# Altium PCB Valdis.PcbDoc
Units mm, origin at the board's own origin, x right, y up, seen from the top; angles counter-clockwise.
Board outline 30 x 42 mm, 4 copper layers (Top Layer, Top Inner Layer, Bottom Inner Layer, Bottom Layer), stack 0.568 mm thick; 54 components, 50 nets, 208 pads, 25 vias.
Unrouted connection lines stored in the file: 43.
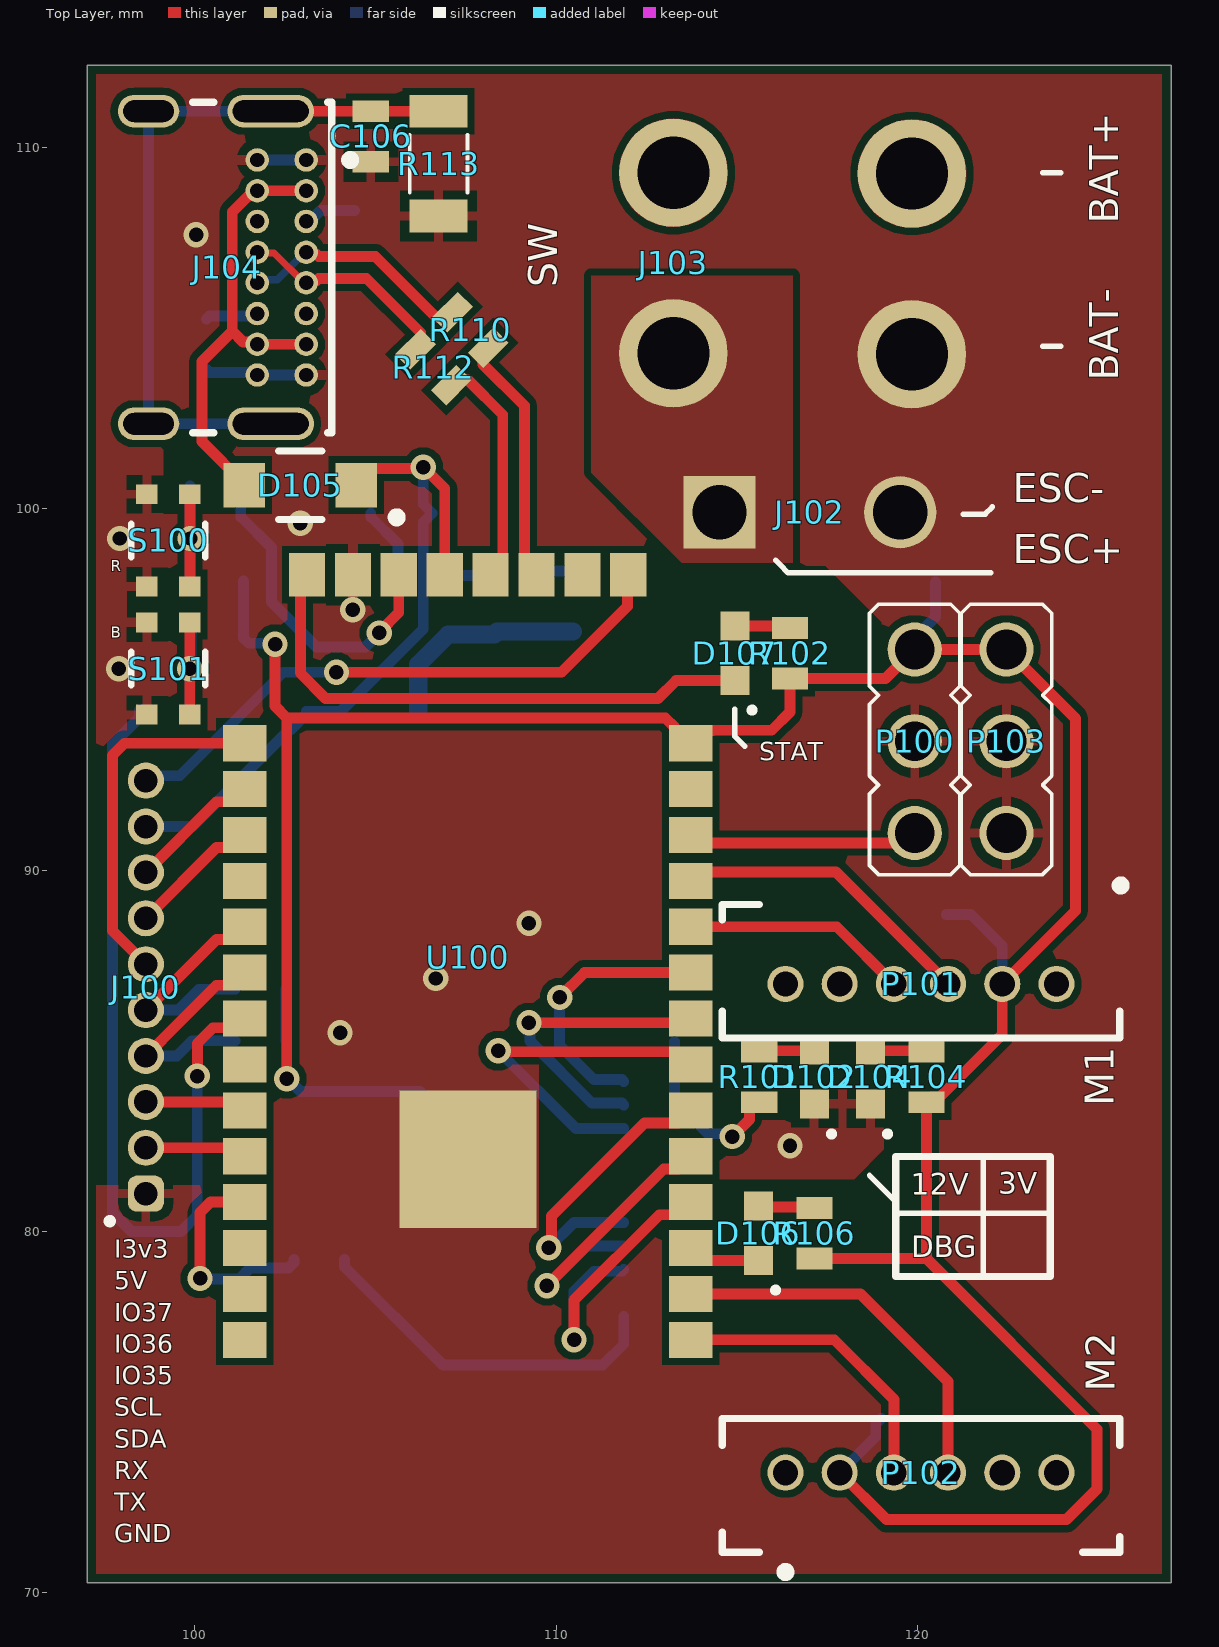
[diagram p0: Top Layer view]
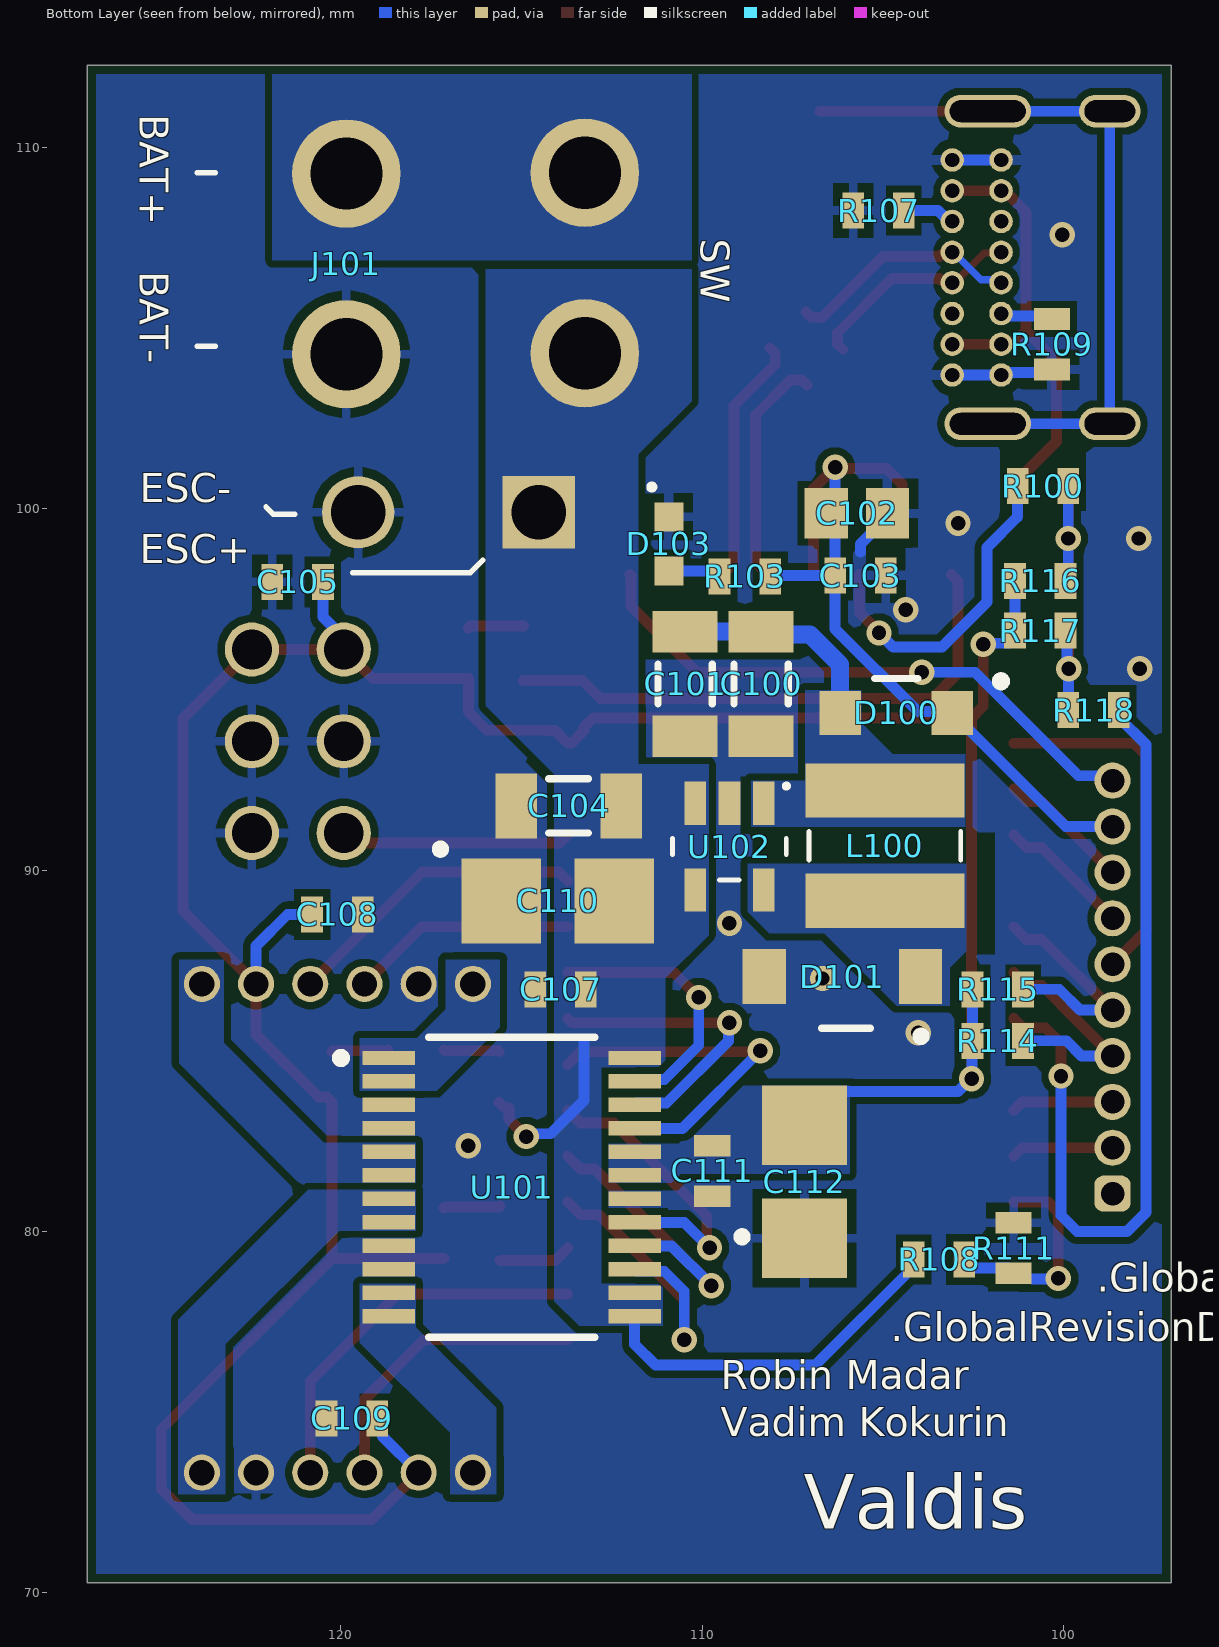
[diagram p1: Bottom Layer view, seen from below]
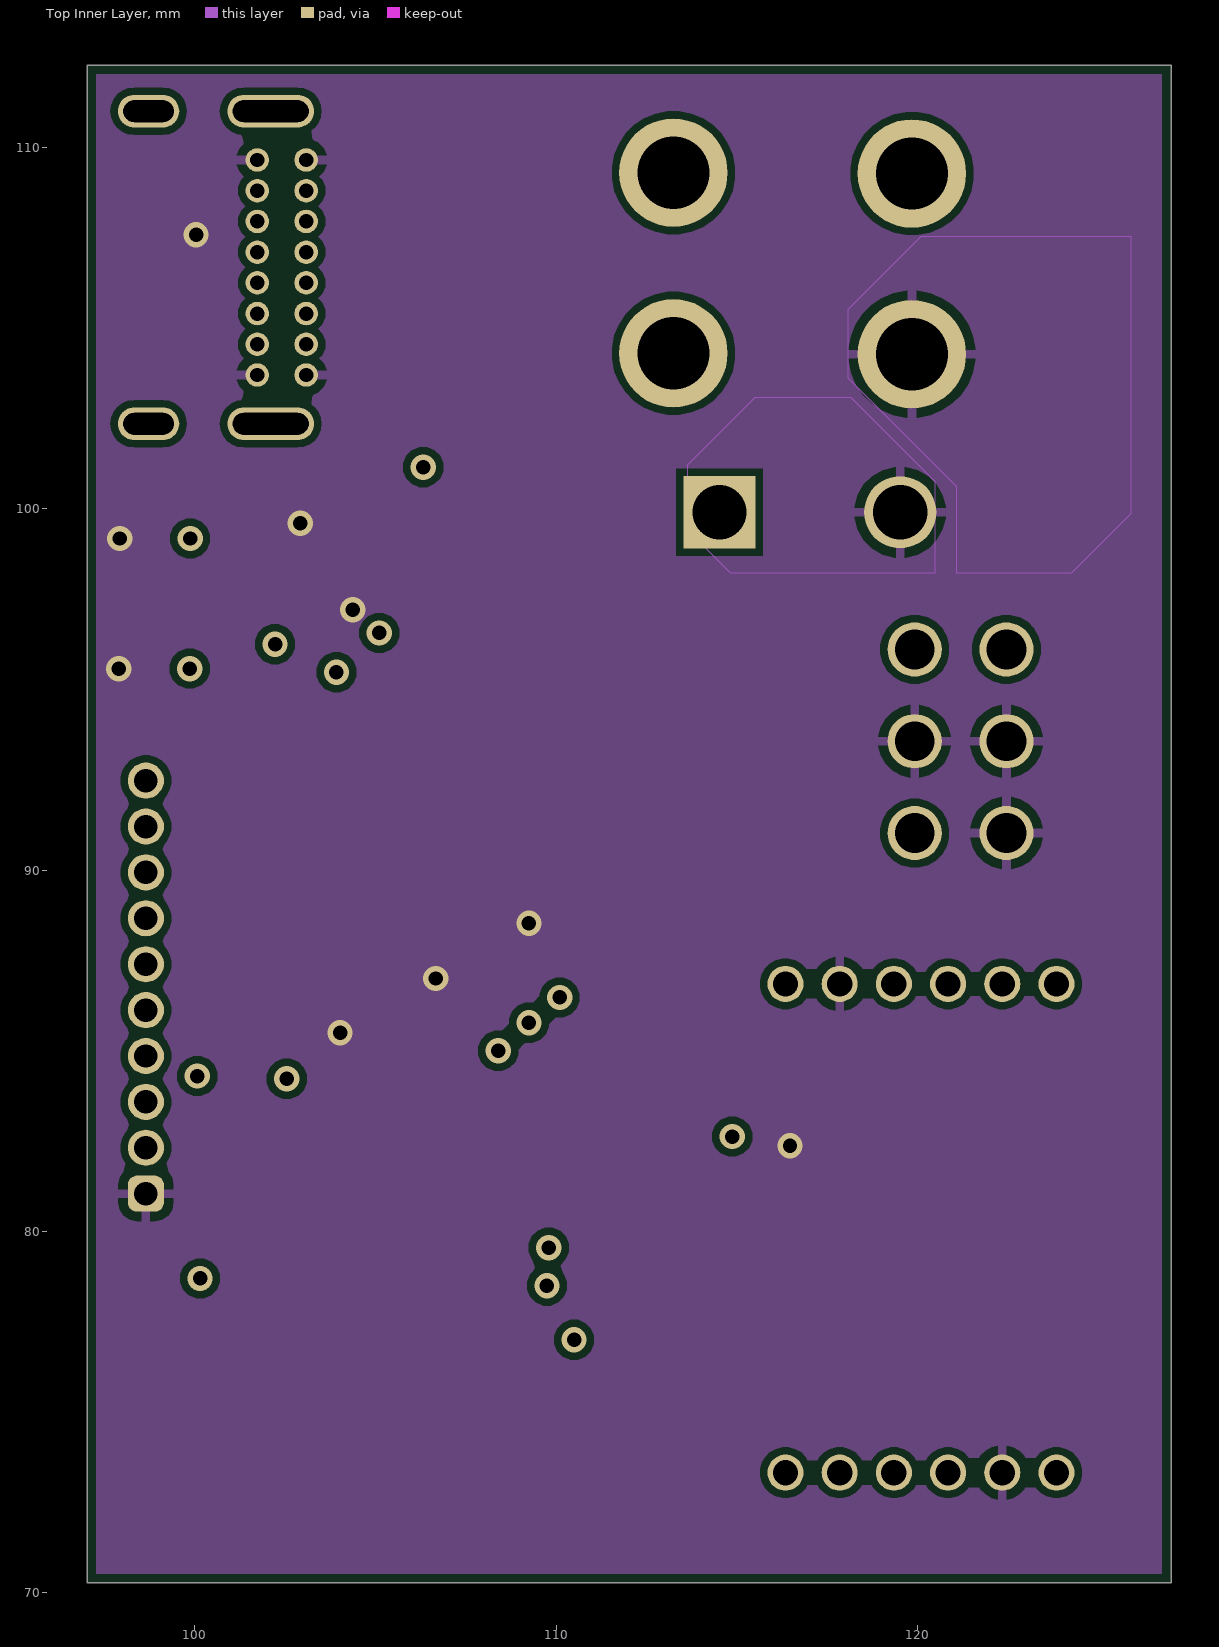
[diagram p2: Top Inner Layer]
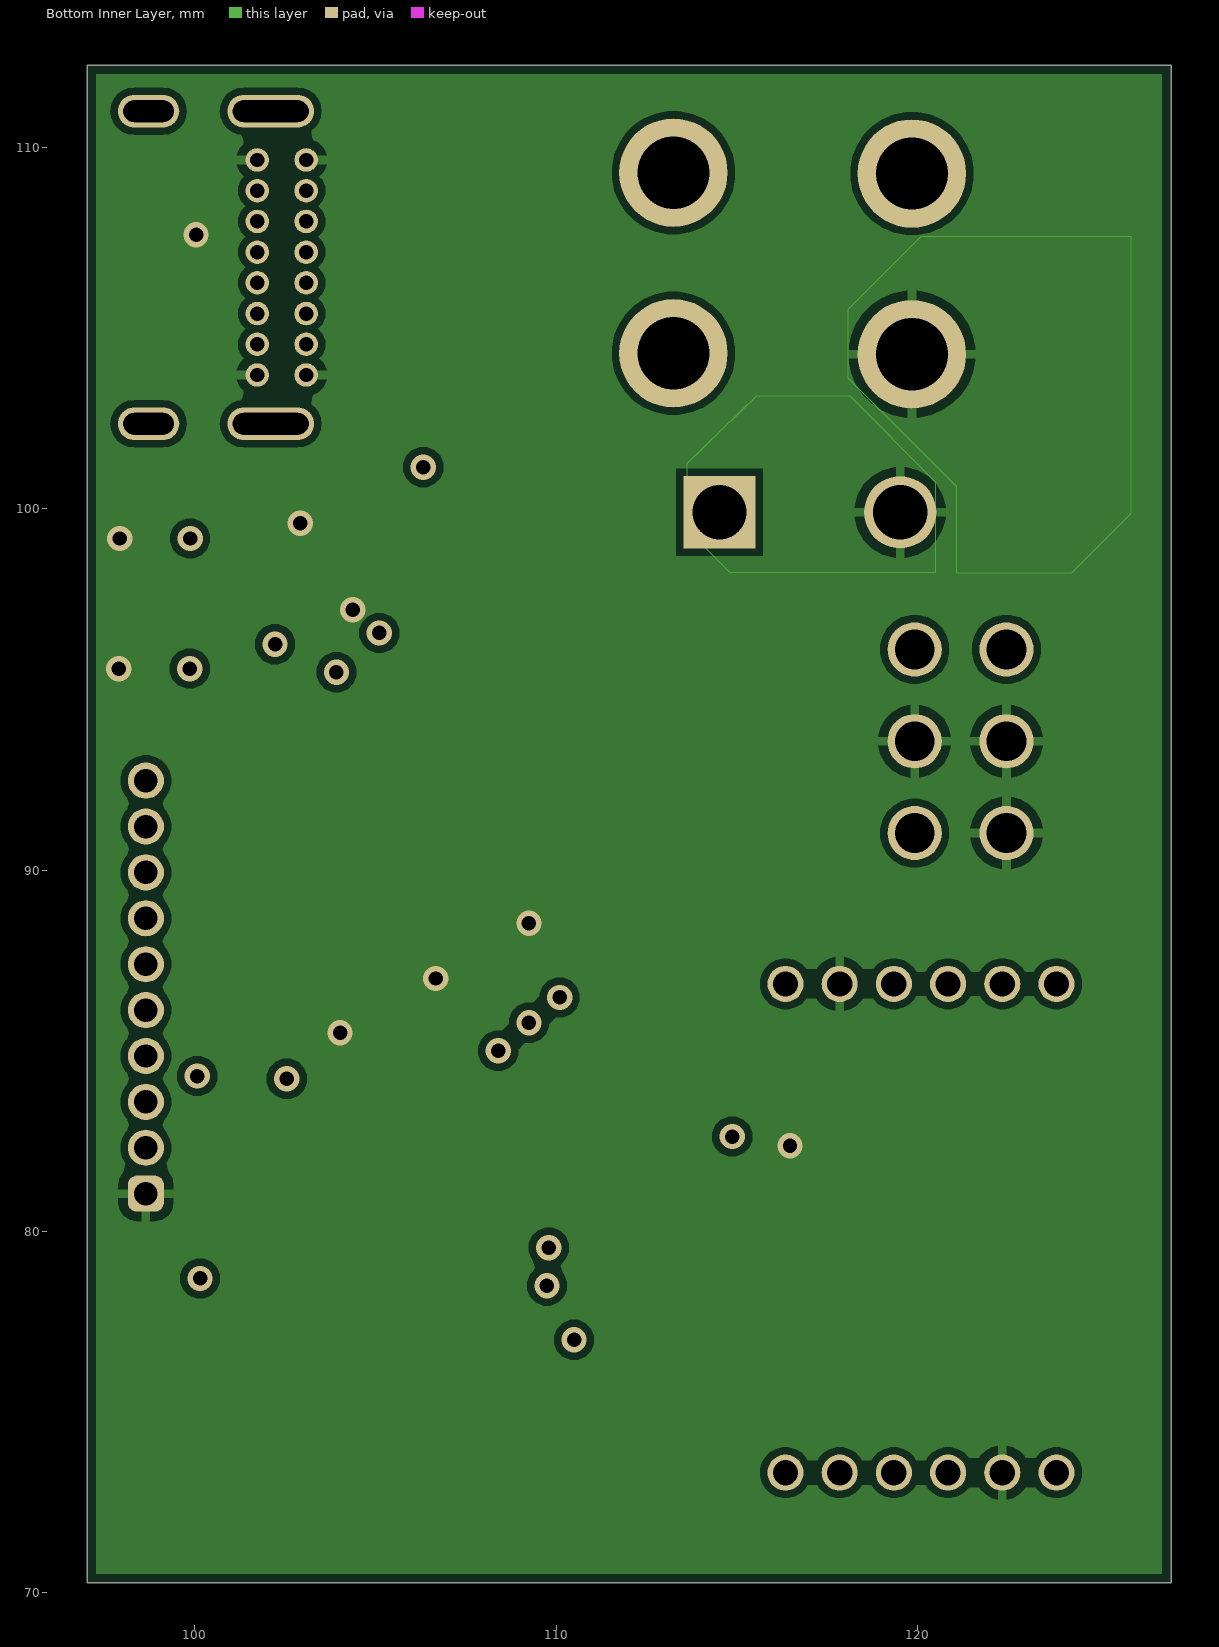
[diagram p3: Bottom Inner Layer]
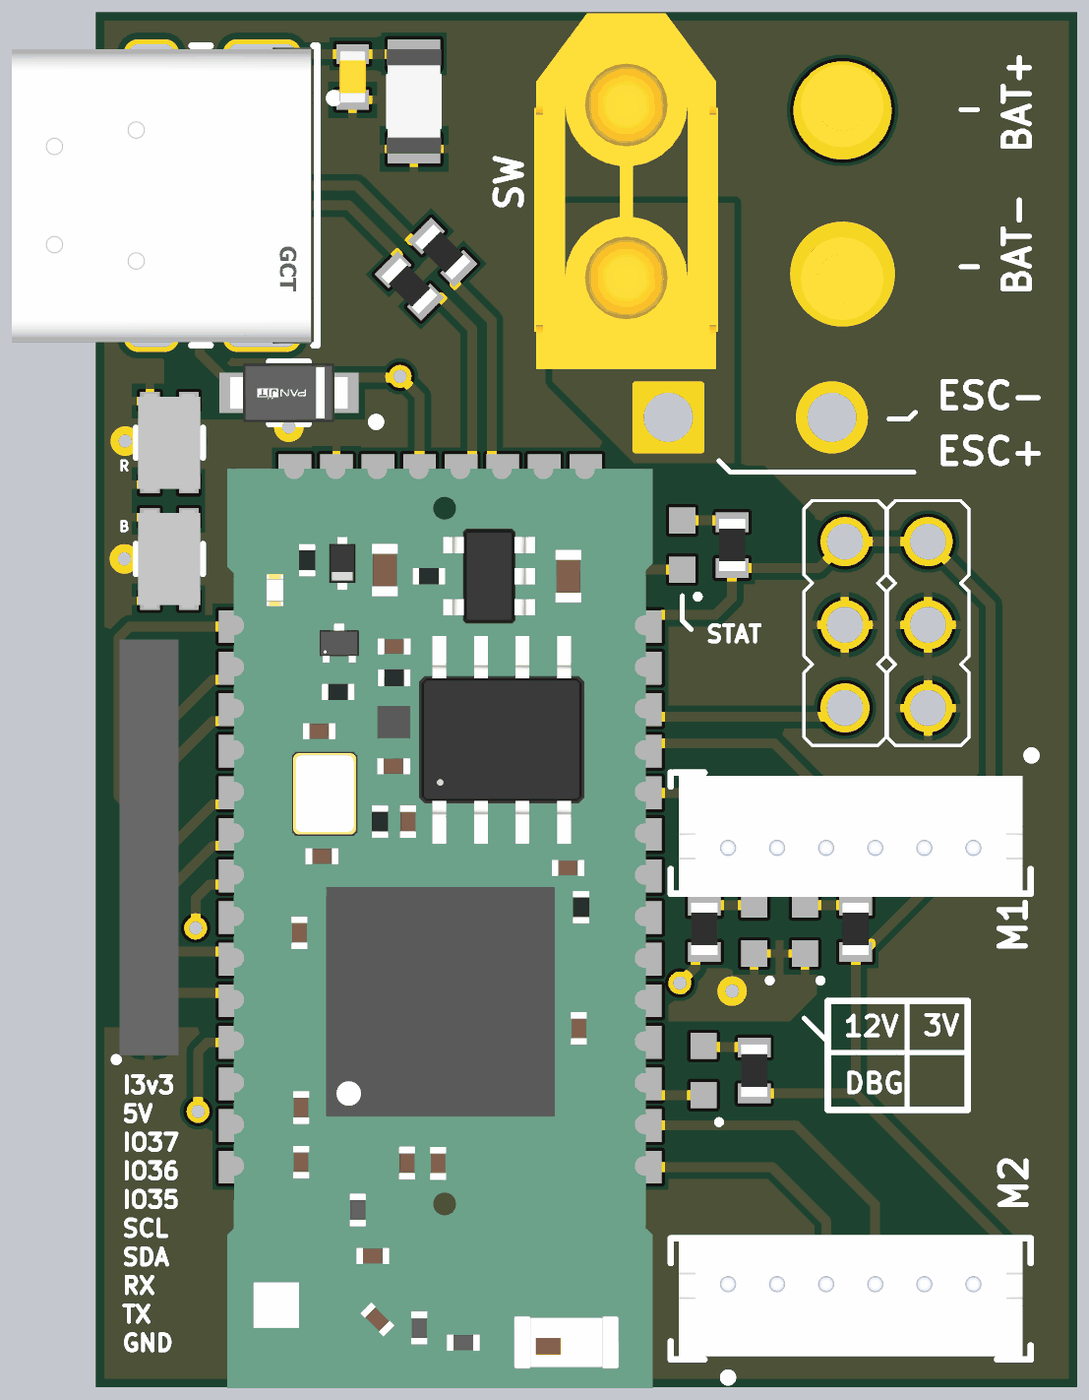
[diagram p4: 3D render of the assembled board from above, using the file's embedded part models]
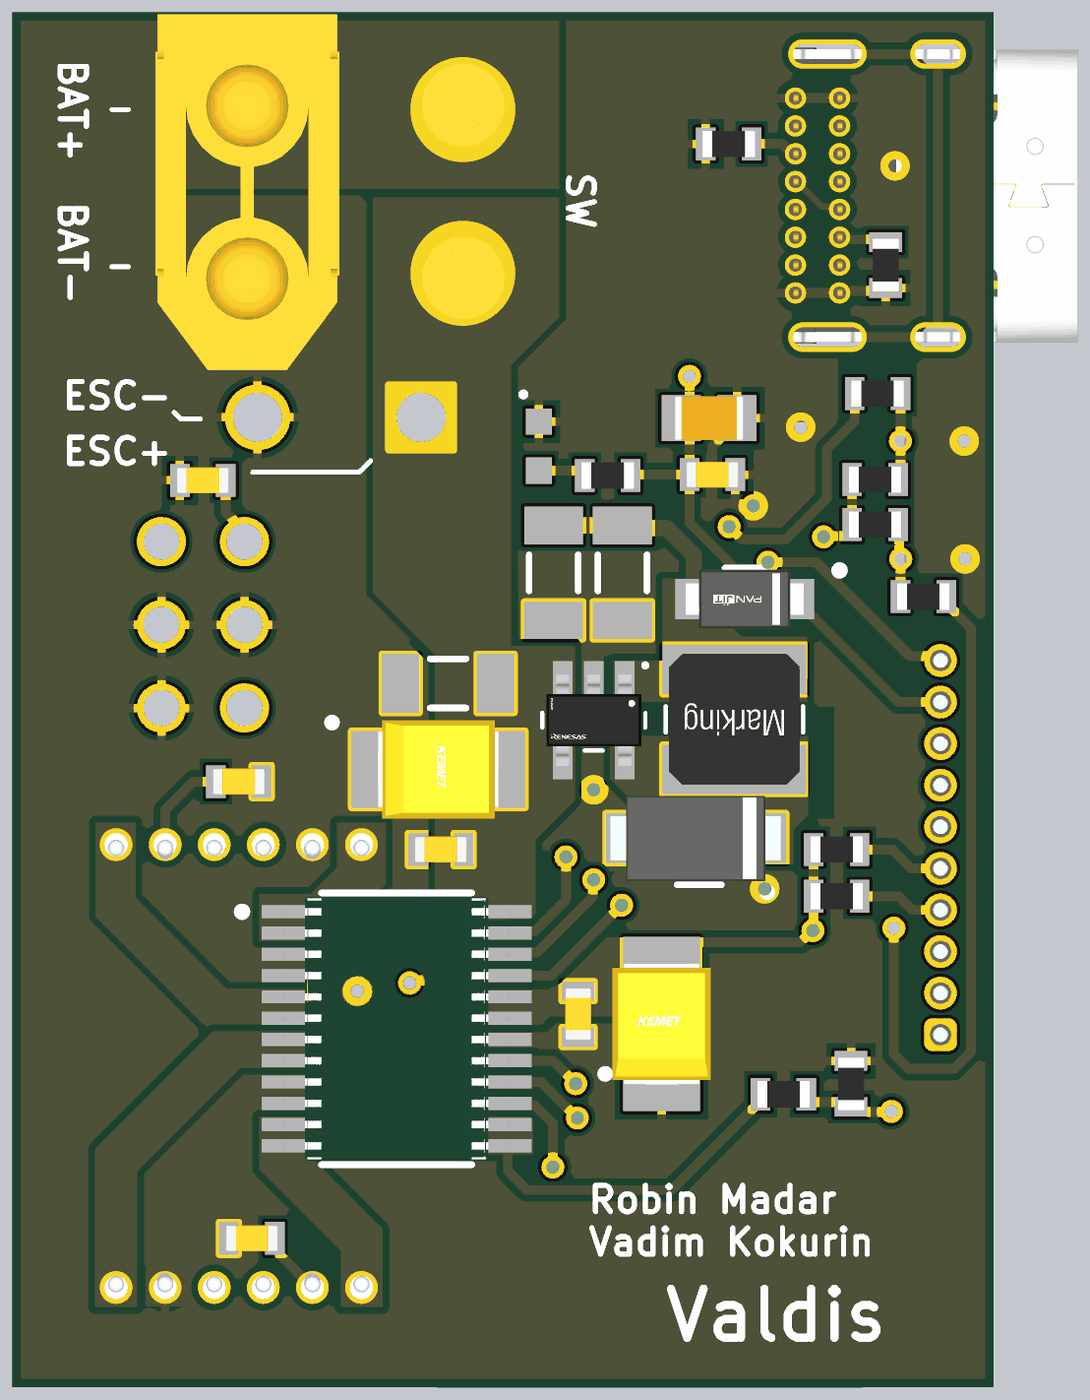
[diagram p5: 3D render of the assembled board from below, using the file's embedded part models]

## Layer stack, top to bottom
Top Solder: solder mask 0.0102, Solder Resist, Dk 3.5
Top Layer: signal copper 0.0356
Dielectric 2: prepreg 0.0711, PP-006, Dk 4.1
Top Inner Layer: signal copper 0.0175
Dielectric 1: dielectric 0.32, FR-4, Dk 4.8
Bottom Inner Layer: signal copper 0.0175
Dielectric 3: prepreg 0.0711, PP-006, Dk 4.1
Bottom Layer: signal copper 0.0356
Bottom Solder: solder mask 0.0102, Solder Resist, Dk 3.5

## Board outline
97.025,70.275 97.025,112.275 127.025,112.275 127.025,70.275

## Design rules (kind name [scope] priority, off if disabled: settings)
BoardOutlineClearance [All] p1: gap=0.254 ignorepadtopadclearanceinfootprint=FALSE except(0: Arc-SplitContinuation Track-SplitContinuation SMDPad-SplitContinuation THPad-SplitContinuation Via-SplitContinuation Fill-SplitContinuation Poly-SplitContinuation Region-SplitContinuation Text-SplitContinuation)
Clearance [All] p1: gap=0.2 ignorepadtopadclearanceinfootprint=FALSE
ComponentClearance [All] p1: gap=0.254 collisioncheckmode=3 verticalgap=0.254 showdistances=FALSE donotcheckwithout3dbody=TRUE
DiffPairsRouting USB90 [All] p1: maxlimit=0.3 minlimit=0.127 mostfreqgap=0.127 toplayer_minwidth=0.12 toplayer_maxwidth=0.3 toplayer_prefwidth=0.12 midlayer1_maxgap=0.2 midlayer1_minwidth=0.111 midlayer1_maxwidth=0.2 midlayer1_prefwidth=0.176 midlayer2_maxgap=0.2 midlayer2_minwidth=0.111 midlayer2_maxwidth=0.2 midlayer2_prefwidth=0.176 bottomlayer_minwidth=0.12 bottomlayer_maxwidth=0.3 bottomlayer_prefwidth=0.12 impedanceprofiledriven=TRUE impedanceprofileid={D86571FE-92CB-432F-B134-A54A2EC93053} impedanceprofilevalue=90.000000 maxuncoupledlength=12.7
DiffPairsRouting DiffPairsRouting_1 [All] p2: maxlimit=0.254 minlimit=0.254 mostfreqgap=0.254 toplayer_minwidth=0.381 toplayer_maxwidth=0.381 toplayer_prefwidth=0.381 midlayer1_minwidth=0.381 midlayer1_maxwidth=0.381 midlayer1_prefwidth=0.381 midlayer2_minwidth=0.381 midlayer2_maxwidth=0.381 midlayer2_prefwidth=0.381 bottomlayer_minwidth=0.381 bottomlayer_maxwidth=0.381 bottomlayer_prefwidth=0.381 maxuncoupledlength=12.7
HoleSize [All] p1: absolutevalues=TRUE maxlimit=3 minlimit=0.025 maxpercent=80.000 minpercent=20.000
MinimumSolderMaskSliver [All] p1: minsoldermaskwidth=0
PlaneClearance [IsNamedPolygon('Main')] p1: clearance=1
PlaneClearance PlaneClearance_1 [All] p2: clearance=0.508
PolygonConnect MainPWR [All vs IsNamedPolygon('Main') OR IsNamedPolygon('Main')] p1: connectstyle=Direct reliefconductorwidth=0.254 reliefentries=4 polygonreliefangle="90 Angle" airgapwidth=0.254
PolygonConnect PolygonConnect_1 [All] p2: thpad.connectstyle=Relief thpad.reliefconductorwidth=0.254 thpad.reliefentries=4 thpad.polygonreliefangle="90 Angle" thpad.airgapwidth=0.254 smdpad.connectstyle=Relief smdpad.reliefconductorwidth=0.254 smdpad.reliefentries=4 smdpad.polygonreliefangle="90 Angle" smdpad.airgapwidth=0.254 via.connectstyle=Direct via.reliefconductorwidth=0.254 via.reliefentries=4 via.polygonreliefangle="90 Angle" via.airgapwidth=0.254
RoutingVias [All] p1: holewidth=0.4 width=0.7 viastyle="Through Hole" minholewidth=0.3 minwidth=0.5 maxholewidth=0.7 maxwidth=1
SilkToSolderMaskClearance [IsPad] p1: minsilkscreentomaskgap=0.1 clearancetoexposedcopper=TRUE
SolderMaskExpansion IsVia [IsVia] p1: expansion=0 istentingtop=FALSE soldermaskfromhole=TRUE
SolderMaskExpansion SolderMaskExpansion_1 [All] p2: expansion=0.102 istentingtop=FALSE
SupplyNets "Schematic Supply Nets_4" [InNet('I3V3')] p1: voltage=0.000
SupplyNets "Schematic Supply Nets_3" [InNet('+3V3')] p2: voltage=0.000
SupplyNets "Schematic Supply Nets_2" [InNet('+5V')] p3: voltage=0.000
SupplyNets "Schematic Supply Nets_1" [InNet('+12V')] p4: voltage=0.000
SupplyNets "Schematic Supply Nets" [InNet('GND')] p5: voltage=0.000
Width [All] p1: maxlimit=3 minlimit=0.2 preferedwidth=0.3 toplayer_maxwidth=2 midlayer1_minwidth=0.254 midlayer1_maxwidth=0.254 midlayer1_prefwidth=0.254 midlayer2_minwidth=0.254 midlayer2_maxwidth=0.254 midlayer2_prefwidth=0.254 minimp=50.000000 maximp=50.000000 favimp=50.000000
24 further rules are at their usual default settings.

## Classes and differential pairs
differential pair USB_D: +USB_D_P -USB_D_N
differential pair D: +D_P -D_N

## Components (designator, comment, footprint, x,y, rotation, side; value= is the part's Value field where it differs from the comment)
C100 "22u" MLCC_1206_M 108.375,95.15 r90 bottom value=22µF
C101 "22u" MLCC_1206_M 110.475,95.15 r90 bottom value=22µF
C102 "4.7u" MLCC_0805_M 105.725,99.875 r0 bottom value=4,7µF
C103 "100n" MLCC_0603_M 105.625,98.15 r0 bottom value=100nF
C104 "4.7u" MLCC_1206_M 113.7,91.775 r180 bottom value=4,7µF
C105 "100n" MLCC_0603_M 121.2,97.975 r0 bottom value=100nF
C106 "1n" MLCC_0603_M 104.875,110.3 r270 top value=1nF
C107 "100n" MLCC_0603_M 113.925,86.7 r0 bottom value=100nF
C108 "100n" MLCC_0603_M 120.1,88.775 r0 bottom value=100nF
C109 "100n" MLCC_0603_M 119.7,74.825 r180 bottom value=100nF
C110 "T495B106K025ATE750" 593D106X9025C2TE3-Footprint-1 114,89.15 r180 bottom value=10µF
C111 "100n" MLCC_0603_M 109.725,81.675 r270 bottom value=100nF
C112 "T495B106K025ATE750" 593D106X9025C2TE3-Footprint-1 107.175,81.375 r90 bottom value=10µF
D100 "MBR1020VL_R1_00001" FP-MBR1020VL_R1_00001-MFG 104.638,94.35 r0 bottom
D101 "VSSAF3M10HM3/H" VSSAF3M10HM3_H-Footprint-1 106.125,87.05 r0 bottom
D102 "Red" "0603 RED LED" 117.15,84.275 r270 top
D103 "Red" "0603 RED LED" 110.925,99.025 r90 bottom
D104 "Red" "0603 RED LED" 118.7,84.275 r270 top
D105 "MBR1020VL_R1_00001" FP-MBR1020VL_R1_00001-MFG 102.925,100.65 r180 top
D106 "Red" "0603 RED LED" 115.6,79.95 r270 top
D107 "Red" "0603 RED LED" 114.95,96 r270 top
J100 "HPH1-A-10-UA" HPH1-A-10-UA 98.65,86.76 r90 top
J101 "XT30U-F" XT30U-F 119.85,106.775 r180 bottom
J102 "CUSTOM ESC" "CUSTOM ESC-Footprint-1" 117.025,99.9 r90 top
J103 "XT30U-F" XT30U-F 113.25,106.8 r180 top
J104 "USB4085-GF-A" FP-USB4085-GF-A-MFG 99.06,106.675 r270 top
L100 "74404043220A" WE-LQS_4025 104.95,90.675 r90 bottom value=22µH
P100 "M20-9990345" "3Pos Pin Header" 119.925,93.545 r270 top
P101 "B6B-ZR(LF)(SN)" FP-B6B-ZR-SM4-TF_LF_SN-MFG 120.1,86.85 r180 top
P102 "B6B-ZR(LF)(SN)" FP-B6B-ZR-SM4-TF_LF_SN-MFG 120.1,73.325 r0 top
P103 "M20-9990345" "3Pos Pin Header" 122.465,93.545 r270 top
R100 "100R" Resistor_0603_M 100.575,100.625 r0 bottom value=100
R101 "680R" Resistor_0603_M 115.625,84.275 r270 top value=680
R102 "200R" Resistor_0603_M 116.475,96 r90 top value=200
R103 "200R" Resistor_0603_M 108.825,98.125 r0 bottom value=200
R104 "100R" Resistor_0603_M 120.25,84.275 r90 top value=100
R106 "200R" Resistor_0603_M 117.15,79.95 r90 top value=200
R107 "5.1k" Resistor_0603_M 105.125,108.25 r0 bottom value=5,1k
R108 "1k" Resistor_0603_M 103.45,79.225 r0 bottom
R109 "5.1k" Resistor_0603_M 100.325,104.55 r90 bottom value=5,1k
R110 "22R" Resistor_0603_M 107.629,104.946 r315 top value=22
R111 "200R" Resistor_0603_M 101.385,79.541 r270 bottom value=220
R112 "22R" Resistor_0603_M 106.609,103.916 r315 top value=22
R113 "1M" Resistor_1206_M 106.75,109.55 r270 top
R114 "4.7k" Resistor_0603_M 101.825,85.275 r0 bottom value=4,7k
R115 "4.7k" Resistor_0603_M 101.825,86.7 r0 bottom value=4,7k
R116 "10k" Resistor_0603_M 100.65,98 r0 bottom
R117 "10k" Resistor_0603_M 100.65,96.625 r0 bottom
R118 "100R" Resistor_0603_M 99.175,94.425 r180 bottom value=100
S100 "USLPT2819DT4TR" USLPT2819DT4TR-Footprint-1 99.275,99.125 r90 top
S101 "USLPT2819DT4TR" USLPT2819DT4TR-Footprint-1 99.275,95.575 r90 top
U100 "NanoS3" NanoS3 108.19,94.365 r270 top
U101 "TB6612FNG,C,8,EL" FP-SSOP24-P-300-0_65A-MFG 115.275,81.225 r180 bottom
U102 "RAA2118054GP3#JA0" P5_064B_MFG 109.25,90.65 r270 bottom

## Footprints (in the part's own frame and the unit in brackets; to place one, negate y for a bottom-side part, rotate by r counter-clockwise, add the part's x,y. Pads: shape width x height; smd on the part's side, far side on the other; paste and mask are expansions set on the pad)
"3Pos Pin Header" [mm]
  round 1.5 hole 1.1: 1(-2.56,0) 2(-0.02,0) 3(2.52,0)
  silkscreen extent -3.81,-1.25 3.67,1.25
593D106X9025C2TE3-Footprint-1 [mm]
  rect 2.2x2.35 smd: 1(-1.56,0) 2(1.56,0)
  silkscreen extent -3.36,1.32 -3.14,1.54, body extent -1.85,-1.5 1.85,1.5, height 2.1
"0603 RED LED" [mm] "Generic 0603 RED LED"
  rect 0.8x0.8 smd: 1(0.75,0) 2(-0.75,0)
  silkscreen extent 1.55,0.45 1.6,0.5, body extent -0.8,-0.4 0.8,0.4, height 0.4
"CUSTOM ESC-Footprint-1" [mm]
  rect 2x2 hole 1.5: 1(0,2.5)
  round 2 hole 1.5: 2(0,-2.5)
FP-B6B-ZR-SM4-TF_LF_SN-MFG [mm]
  round 1 hole 0.7 paste-2539.97 mask+0: 1(-3.75,0) 2(-2.25,0) 3(-0.75,0) 4(0.75,0) 5(2.25,0) 6(3.75,0)
  silkscreen extent -5.65,-2.85 5.5,1.5, body extent -5.25,-2.1 5.25,1.4, height 4.5
FP-MBR1020VL_R1_00001-MFG [mm]
  rect 1.15x1.22 smd paste+0 mask+0: 1(-1.55,0) 2(1.55,0)
  silkscreen extent -3.02,-1 0.6,-0.75, body extent -1.8,-0.9 1.8,0.9, height 1.1
FP-SSOP24-P-300-0_65A-MFG [mm]
  rect 1.45x0.4 smd paste+0 mask+0: 1(-3.4,3.575) 2(-3.4,2.925) 3(-3.4,2.275) 4(-3.4,1.625) 5(-3.4,0.975) 6(-3.4,0.325) 7(-3.4,-0.325) 8(-3.4,-0.975) 9(-3.4,-1.625) 10(-3.4,-2.275) 11(-3.4,-2.925) 12(-3.4,-3.575) 13(3.4,-3.575) 14(3.4,-2.925) 15(3.4,-2.275) 16(3.4,-1.625) 17(3.4,-0.975) 18(3.4,-0.325) 19(3.4,0.325) 20(3.4,0.975) 21(3.4,1.625) 22(3.4,2.275) 23(3.4,2.925) 24(3.4,3.575)
  silkscreen extent -4.85,-4.15 2.3,4.15, body extent -3.8,-4.03 3.8,4.03, height 1.6
FP-USB4085-GF-A-MFG [mm]
  rrect100% 0.9x2.4 hole 2.1 slot 0.6 at 0 deg paste-2539.97 mask+0: 1(-4.325,3.045) 2(4.325,3.045)
  rrect100% 0.9x1.7 hole 1.4 slot 0.6 at 0 deg paste-2539.97 mask+0: 3(-4.325,-0.335) 4(4.325,-0.335)
  round 0.65 hole 0.4 paste-2539.97 mask+0: A1(-2.975,4.025) A4(-2.125,4.025) A5(-1.275,4.025) A6(-0.425,4.025) A7(0.425,4.025) A8(1.275,4.025) A9(2.125,4.025) A12(2.975,4.025) B1(2.975,2.675) B4(2.125,2.675) B5(1.275,2.675) B6(0.425,2.675) B7(-0.425,2.675) B8(-1.275,2.675) B9(-2.125,2.675) B12(-2.975,2.675)
  silkscreen extent -4.57,0.89 4.57,5.37, body extent -4.51,-4.6 4.51,4.57, height 3.46
HPH1-A-10-UA [mm] "1.27 MM SOCKET HEADER; 10 POS"
  rrect50% 1x1 hole 0.65: 1(-5.715,0)
  round 1 hole 0.65: 2(-4.445,0) 3(-3.175,0) 4(-1.905,0) 5(-0.635,0) 6(0.635,0) 7(1.905,0) 8(3.175,0) 9(4.445,0) 10(5.715,0)
  silkscreen extent -6.55,0.93 -6.4,1.07, body extent -6.35,-0.9 6.35,0.9, height 4.47
MLCC_0603_M [mm]
  rect 0.6x1 smd: 1(-0.7,0) 2(0.7,0)
  body extent -0.8,-0.4 0.8,0.4, height 0.92
MLCC_0805_M [mm] "Chip Capacitor, 2-Leads, Body 2,00x1,25mm, IPC Medium Density"
  rect 1.2x1.4 smd: 1(-0.85,0) 2(0.85,0)
  body extent -1.05,-0.67 1.05,0.67, height 1.35
MLCC_1206_M [mm]
  rect 1.15x1.8 smd: 1(-1.45,0) 2(1.45,0)
  silkscreen extent -0.55,-0.75 0.55,0.75, body extent -1.7,-0.9 1.7,0.9, height 0.75
NanoS3 [mm]
  rect 1.2x1 smd: 1(-3.81,-5.08) 2(-3.81,-3.81) 3(-3.81,-2.54) 4(-3.81,-1.27) 5(-3.81,0) 6(-3.81,1.27) 7(-3.81,2.54) 8(-3.81,3.81)
  rect 1x1.2 smd: 9(0.854,5.535) 10(2.124,5.535) 11(3.394,5.535) 12(4.664,5.535) 13(5.934,5.535) 14(7.204,5.535) 15(8.474,5.535) 16(9.744,5.535) 17(11.014,5.535) 18(12.284,5.535) 19(13.554,5.535) 20(14.824,5.535) 21(16.094,5.535) 22(17.364,5.535) 23(0.854,-6.805) 24(2.124,-6.805) 25(3.394,-6.805) 26(4.664,-6.805) 27(5.934,-6.805) 28(7.204,-6.805) 29(8.474,-6.805) 30(9.744,-6.805) 31(11.014,-6.805) 32(12.284,-6.805) 33(13.554,-6.805) 34(14.824,-6.805) 35(16.094,-6.805) 36(17.364,-6.805)
  rect 3.8x3.8 smd: 37(12.364,-0.625)
  body extent -3.97,-7.15 24.12,5.85, height 2.38
P5_064B_MFG [mm] "Recommended Land Pattern"
  rect 1.2x0.6 smd paste+0 mask+0: 1(-1.2,0.95) 2(-1.2,0) 3(-1.2,-0.95) 4(1.2,-0.95) 5(1.2,0.95)
  silkscreen extent -1.74,-1.58 0.92,1.64, body extent -1.4,-1.45 1.4,1.45, height 1.1
Resistor_0603_M [mm]
  rect 0.6x1 smd: 1(-0.7,0) 2(0.7,0)
  body extent -0.8,-0.4 0.8,0.4, height 0.45
Resistor_1206_M [mm]
  rect 0.9x1.6 smd: 1(-1.45,0) 2(1.45,0)
  silkscreen extent -0.8,-0.8 0.8,0.8, body extent -1.6,-0.83 1.6,0.83, height 0.56
USLPT2819DT4TR-Footprint-1 [mm]
  rect 0.55x0.6 smd: 1(-1.275,0.6) 2(1.275,0.6) 3(-1.275,-0.59) 4(1.275,-0.59)
  silkscreen extent -0.46,-1.02 0.46,1.03, body extent -1.5,-0.94 1.5,0.96, height 0.53
VSSAF3M10HM3_H-Footprint-1 [mm]
  rect 1.2x1.52 smd: 1(-2.16,0) 2(2.16,0)
  silkscreen extent -2.29,1.43 0.58,1.76, body extent -2.59,-1.29 2.61,1.31, height 1
WE-LQS_4025 [mm] "SMD Power Inductor, 2-Leads, body 4x4mm"
  rect 1.5x4.4 smd: 1(-1.525,0) 2(1.525,0)
  silkscreen extent -0.4,-2.1 0.4,2.1, body extent -2,-2 2,2, height 2.15
XT30U-F [mm]
  round 3 hole 2: 1(0,2.5) 2(0,-2.5)
  body extent -2.8,-5.44 2.82,5.43, height 9.67

## Part data
C100 C101: library part CMP-001-1113-2, "MLCC, 1206, 22u, 10%, 16V, X5R", Capacitor Type=Ceramic, Case/Package=1206, Dielectric=X5R, Manufacturer=Any, Tolerance=10%, Voltage=16V, Mount=SMD, Part number="MLCC, 1206, 22u, 10%, 16V, X5R", RoHS=Yes
C102: library part CMP-001-0828-2, "MLCC, 0805, 4.7u, 10%, 50V, X5R", Capacitor Type=Ceramic, Case/Package=0805, Dielectric=X5R, Manufacturer=Any, Tolerance=10%, Voltage=50V, Mount=SMD, Part number="MLCC, 0805, 4.7u, 10%, 50V, X5R", RoHS=Yes
C103 C108 C109: library part CMP-001-0755-1, "MLCC, 0603, 100n, 10%, 35V, X7R", Capacitor Type=Ceramic, Case/Package=0603, Dielectric=X7R, Manufacturer=Any, Tolerance=10%, Voltage=35V, Mount=SMD, Part number="MLCC, 0603, 100n, 10%, 35V, X7R", RoHS=Yes
C104: library part CMP-001-1124-2, "MLCC, 1206, 4.7u, 10%, 35V, X5R", Capacitor Type=Ceramic, Case/Package=1206, Dielectric=X5R, Manufacturer=Any, Tolerance=10%, Voltage=35V, Mount=SMD, Part number="MLCC, 1206, 4.7u, 10%, 35V, X5R", RoHS=Yes
C105 C107 C111: library part CMP-001-0815-1, "MLCC, 0603, 100n, 10%, 50V, X7R", Capacitor Type=Ceramic, Case/Package=0603, Dielectric=X7R, Manufacturer=Any, Tolerance=10%, Voltage=50V, Mount=SMD, Part number="MLCC, 0603, 100n, 10%, 50V, X7R", RoHS=Yes
C106: library part CMP-001-0786-1, "MLCC, 0603, 1n, 10%, 50V, X7R", Capacitor Type=Ceramic, Case/Package=0603, Dielectric=X7R, Manufacturer=Any, Tolerance=10%, Voltage=50V, Mount=SMD, Part number="MLCC, 0603, 1n, 10%, 50V, X7R", RoHS=Yes
C110 C112: library part CMP-0001-00298-2, "10UF Solid MNO2 Tantalum Electrolytic Capacitor, 25 V DC +/-10%, T495 Series", Capacitor Type=Tantalum, Case Code (Imperial)=1411, Case Code (Metric)=3528, Case/Package=B, ESR (Equivalent Series Resistance)=750mΩ, Leakage Current=2.5µA, Manufacturer=Any, Max Operating Temperature=125°C, Min Operating Temperature=-55°C, Ripple Current=54mA, Tolerance=10%, Voltage=25V, China RoHS=Compliant, Dielectric=Tantalum, Dielectric Material=Tantalum, Export Control Classification Number (ECCN) Code=EAR99, Harmonized Tariff Schedule (HTS) Code=8532.21.00.50, Height=1.9mm, Introduction Date=2007-02-01, Length=3.5mm, Lifecycle Status=Production, Mount=SMD, Mounting Technology="Surface Mount", Number of Terminals=2, Packaging="Cut Tape", Part number=T495B106K025ATE750, Pins=2, REACH SVHC=Yes, RoHS=Compliant, Termination=SMD/SMT, Voltage Rating=25V, Voltage Rating (DC)=25V, Width=2.8mm
D100 D105: library part CMP-ROOT-01310-1, "Rectifier Diode, Schottky, 1 Phase, 1 Element, 1A, 20V V(RRM), Silicon", Case/Package=SOD-123FL, Forward Current=1A, Manufacturer=Panjit, Max Forward Surge Current (Ifsm)=45A, Max Junction Temperature (Tj)=125°C, Max Repetitive Reverse Voltage (Vrrm)=20V, Min Operating Temperature=-55°C, Peak Reverse Current=600µA, Height=1.1mm, Lifecycle Status=Production, Max Operating Temperature=125°C, Max Output Current=1A, Mount=SMD, Number of Elements=1, Number of Terminals=2, Part number=MBR1020VL_R1_00001, Pins=2, REACH SVHC=No, Reverse Standoff Voltage=20V, RoHS=Compliant
D101: library part CMP-ROOT-01308-1, "Rectifier Diode, Schottky, 1 Phase, 1 Element, 2.3A, 100V V(RRM), Silicon, DO-221AC", Case/Package=DO-221AC-2, Forward Voltage=720mV, Max Forward Surge Current (Ifsm)=80A, Max Operating Temperature=175°C, Max Output Current=2.3A, Min Operating Temperature=-40°C, Peak Reverse Current=200µA, Reverse Standoff Voltage=100V, Lifecycle Status=Production, Manufacturer=VSSAF3M10HM3/H, Mount=SMD, Number of Elements=1, Number of Terminals=2, Part number=VSSAF3M10HM3/H, Pins=2, REACH SVHC=No, RoHS=Compliant
D102 D103 D104 D106 D107: library part CMP-ROOT-00025-2, "Generic red 0603 LED", Case/Package=0603, Manufacturer=Any, Part number="Any Red 0603 LED", Color=Red, Mount=SMD, RoHS=Yes
J100: library part CMP-001-1902-1, "Conn Unshrouded Header HDR 10 POS 1.27mm Solder ST Top Entry Thru-Hole", Contact Resistance=20mΩ, Current Rating=1A, Dielectric Material=Polyethylene, Insulation Resistance=5GΩ, Manufacturer="Adam Tech", Max Operating Temperature=105°C, Min Operating Temperature=-40°C, Contact Gender=Male, Lifecycle Status=Production, Mount=TH, Number of Rows=1, Part number=HPH1-A-10-UA, Pins=10, REACH SVHC=Yes, RoHS=Compliant, Terminal Pitch=1.27mm
J101 J103: library part CMP-ROOT-01262-3, "Power Connector", Case/Package=Non-standard, Color=Yellow, Manufacturer=AMASS, Contact Material=Brass, Mount=SMD, Orientation=Straight, Part number=XT30U-F, Pins=2, RoHS=Yes
J102: library part CMP-ROOT-01320-4, "Custom ESC pinout", Manufacturer=None, Mount=SMD, Part number=None, Pins=2, RoHS=Yes
J104: library part CMP-001-1800-1, "USB Connector, 16 Contact(s), Female, Right Angle, Solder Terminal, Locking, Receptacle", Current Rating=4.25A, Flammability Rating="UL94 V-0", Insulation Color=Black, Manufacturer=GCT, Max Operating Temperature=85°C, Min Operating Temperature=-40°C, Part number=USB4800-03-A, Voltage Rating=20V, Connector Type=USB, Contact Material="Copper Alloy", Contact Plating=Gold, Gender=Receptacle, Height=3.66mm, Mating Cycles=10000, Mount=TH, Mounting Technology="Through Hole,Horizontal", Number of Contacts=16, Number of Ports=1, Number of Positions=16, Orientation="Right Angle", Packaging="Tape and Reel", Pins=16, RoHS=Yes, Series=USB4085, Shielding=Shielded, Standoff Height=3.5mm, Termination=Solder, USB PD=3.2, USB Standard="USB 2.0"
L100: library part CMP-ROOT-01309-1, "General Purpose Inductor, 22uH, 20%, 1 Element, Nickel-zinc Ferrite-Core, SMD, 1616", Ambient Temperature Range High=85°C, Ambient Temperature Range Low=-40°C, Case/Package="4mm x 4mm", Current Rating=1.11A, DC Resistance (DCR)=200mΩ, Inductance Tolerance=20%, Manufacturer="Wurth Elektronik", Max Operating Temperature=125°C, Height=2.5mm, Length=4mm, Min Operating Temperature=-40°C, Mount=SMD, Part number=74404043220A, Pins=2, RoHS=Compliant, Width=4mm
P100 P103: library part CMP-ROOT-00217-1, "Connector Header Through Hole 3 position 0.100\" (2.54mm)", Case/Package=SIL, Color=Black, Contact Resistance=25mR, Current Rating=3A, Insulation Resistance=10GR, Manufacturer="Harwin Inc.", Max Operating Temperature=105°C, Min Operating Temperature=-40°C, Package Quantity=1000, Voltage Rating (AC)=750V, Connector Type="Male Pin", Contact Material=Brass,Bronze, Contact Mating Length=0.24inch, Contact Plating=Gold, Depth=2.54mm, Height=0.125inch, Housing Color=Black, Housing Material=Nylon, Length=7.62mm, Max Current Rating=3A, Mount="Through Hole", Number of Contacts=3, Number of Positions=3, Number of Rows=1, Orientation=Straight, Packaging=Bulk, Part number=M20-9990345, Pins=3, Pitch=2.54mm, Radiation Hardening=No, REACH SVHC="No SVHC", RoHS=Yes, Termination=Solder, Weight=0.006138oz, Width=0.25inch
P101 P102: library part CMP-ROOT-01270-3, "Header for PCB; pitch 1.50mm; 6-contacts; THT; male; top entry; 50V/1A", Color="Natural, White", Contact Resistance=30mΩ, Current Rating=1A, Flammability Rating="UL94 V-0", Insulation Resistance=500MΩ, Manufacturer="JST Sales America Inc.", Max Operating Temperature=85°C, Max Voltage Rating (AC)=50V, Min Operating Temperature=-25°C, Part number=B6B-ZR, Body Plating=Tin, China RoHS=Compliant, Connector Type="Male Pin", Contact Gender=Male, Contact Material="Copper, Tin", Contact Mating Length=2.3876mm, Contact Plating=Tin, Depth=3.5mm, Fastening Type=Detent, Gender=Male, Height=4.5mm, Housing Material=Polyamide, Lead Free="Lead Free", Lead Pitch=1.5mm, Length=3.048mm, Lifecycle Status=Production, Material=Nylon, Max Current Rating=1A, Mount=TH, Mounting Technology="Through Hole", Number of Contacts=6, Number of Positions=6, Number of Rows=1, Orientation=Straight, Packaging=Bulk, Panel Thickness=3.5mm, Pins=6, Pitch=1.5mm, REACH SVHC=Yes, RoHS=Compliant, Terminal Pitch=1.5mm, Termination=Solder, Voltage Rating=50V, Voltage Rating (AC)=50V, Voltage Rating (DC)=50V, Weight=28.349523g, Width=5.08mm
R100 R118: library part CMP-001-0054-5, "Resistor, 0603, 100R, 1%, 1/10W", Case/Package=0603, Manufacturer=Any, Power=100mW, Tolerance=1%, Mount=SMD, Part number="Resistor, 0603, 100R, 1%, 1/10W", RoHS=Yes
R101: library part CMP-001-0074-3, "Resistor, 0603, 680R, 1%, 1/10W", Case/Package=0603, Manufacturer=Any, Power=100mW, Tolerance=1%, Mount=SMD, Part number="Resistor, 0603, 680R, 1%, 1/10W", RoHS=Yes
R102 R103 R106: library part CMP-001-0060-2, "Resistor, 0603, 200R, 1%, 1/10W", Case/Package=0603, Manufacturer=Any, Power=100mW, Tolerance=1%, Mount=SMD, Part number="Resistor, 0603, 200R, 1%, 1/10W", RoHS=Yes
R104: library part CMP-0001-00262-1, "Resistor, 0603, 100R, ≤5%, ≥1/16W", Case/Package=0603, Manufacturer=Any, Mount=SMD, Part number="Resistor, 0603, 100R, ≤5%, ≥1/16W", RoHS=Yes
R107 R109: library part CMP-001-0094-2, "Resistor, 0603, 5.1k, 1%, 1/10W", Case/Package=0603, Manufacturer=Any, Power=100mW, Tolerance=1%, Mount=SMD, Part number="Resistor, 0603, 5.1k, 1%, 1/10W", RoHS=Yes
R108: library part CMP-0001-00237-1, "Resistor, 0603, 1k, 0.1%, 1/16W", Case/Package=0603, Manufacturer=Any, Mount=SMD, Part number=Any, RoHS=Yes
R110 R112: library part CMP-001-0038-3, "Resistor, 0603, 22R, 1%, 1/10W", Case/Package=0603, Manufacturer=Any, Power=100mW, Tolerance=1%, Mount=SMD, Part number="Resistor, 0603, 22R, 1%, 1/10W", RoHS=Yes
R111: library part CMP-001-0061-2, "Resistor, 0603, 220R, 1%, 1/10W", Case/Package=0603, Manufacturer=Any, Power=100mW, Tolerance=1%, Mount=SMD, Part number="Resistor, 0603, 220R, 1%, 1/10W", RoHS=Yes
R113: library part CMP-0001-00051-1, "Resistor, 1206, 1M, 1%, 1/4W", Case/Package=1206, Manufacturer=Any, Mount=SMD, Part number=Any, RoHS=Yes
R114 R115: library part CMP-001-0093-2, "Resistor, 0603, 4.7k, 1%, 1/10W", Case/Package=0603, Manufacturer=Any, Power=100mW, Tolerance=1%, Mount=SMD, Part number="Resistor, 0603, 4.7k, 1%, 1/10W", RoHS=Yes
R116 R117: library part CMP-001-0101-2, "Resistor, 0603, 10k, 1%, 1/10W", Case/Package=0603, Manufacturer=Any, Power=100mW, Tolerance=1%, Mount=SMD, Part number="Resistor, 0603, 10k, 1%, 1/10W", RoHS=Yes
S100 S101: library part CMP-ROOT-01290-3, "Keypad Switch, SPST, 0.05A, 1.96N, Solder Terminal, Panel Mount", Case/Package=Non-standard, Color=Black, Contact Current Rating=50mA, Manufacturer="TE Connectivity ALCOSWITCH Switches", Max Operating Temperature=85°C, Min Operating Temperature=-40°C, Operating Force=1.96N, China RoHS=Compliant, Contact Material="Stainless Steel", Contact Plating=Silver, Housing Material=Polyethylene, Lifecycle Status=Production, Max Current Rating=50mA, Mount=SMD, Packaging="Tape & Reel", Part number=USLPT2819DT4TR, REACH SVHC=Yes, RoHS=Compliant, Throw Configuration=SPST
U100: library part CMP-00023-1, "Unexpected Maker's NanoS3 DevKit", Case/Package=DevKit, Manufacturer="Unexpected Maker", Mount=SMD, Part number=NanoS3, RoHS=Yes
U101: library part CMP-00025-1, "DC Motor Driver 2.7V to 5.5V 24-Pin SSOP Embossed T/R", Case/Package=LSSOP, Manufacturer=Toshiba, Manufacturer Package Identifier=SSOP24-P-300-0.65A, Max Operating Temperature=85°C, Max Output Current=1A, Max Power Dissipation=1.36W, Max Supply Current=2.2mA, Max Supply Voltage=5.5V, Min Operating Temperature=-20°C, Min Supply Voltage=2.7V, Operating Supply Voltage=3V, Output Voltage=15V, Part number=TBG6612FNG, Switching Frequency=100kHz, Export Control Classification Number (ECCN) Code=EAR99, Harmonized Tariff Schedule (HTS) Code=8542.39.00.60, Height=1.6mm, Height - Seated (Max)=1.6mm, Interface=Parallel, Introduction Date=2014-12-16, Length=7.8mm, Lifecycle Status=Production, Logic Function=AND, Motor Type=Brushed, Mount=SMD, Mounting Technology="Surface Mount", Number of Channels=2, Number of Circuits=2, Number of Outputs=2, Number of Terminals=24, Output Current=1A, Packaging="Cut Tape (CT)", Pins=24, REACH SVHC=Yes, RoHS=Compliant, Schedule B="8542390000, 8542390000", Terminal Pitch=650µm, Width=5.6mm
U102: library part CMP-00019-3, "Switching Regulator, Current-mode, 0.3A, 230kHz Switching Freq-Max, PDSO5", Case/Package=TSOT, Manufacturer="Renesas / Intersil", Manufacturer Lifecycle Status=ACTIVE, Max Junction Temperature (Tj)=125°C, Max Output Current=300mA, Max Output Voltage=5.15V, Max Supply Voltage=80V, Max Switching Frequency=230kHz, Min Input Voltage=7V, Min Operating Temperature=-40°C, Min Output Voltage=3.18V, Nominal Output Voltage=5V, Nominal Supply Voltage=18V, Package Quantity=3000, Export Control Classification Number (ECCN) Code=EAR99, Harmonized Tariff Schedule (HTS) Code=8540000000, Height=850µm, Height - Seated (Max)=1.1mm, Length=2.9mm, Lifecycle Status=Production, Max Operating Temperature=125°C, Mount=SMD, Mounting Technology="Surface Mount", MSL=3, Number of Circuits=1, Number of Terminals=5, Part Family=RAA211805, Part number=RAA2118054GP3#JA0, Pins=5, Pitch=1mm, REACH SVHC=Yes, RoHS=Compliant, Terminal Pitch=950µm, Topology=Buck, Width=1.6mm

## Via types
v1: diameter 0.7, hole 0.4, Top Layer to Bottom Layer, 25 vias

## Nets (pads, with @x,y where several pads share a name; then routed paths per layer and width w, separated by ;. In a path a pad name is that pad's centre, name@x,y a point inside that pad or via, vN(x,y) a via of type N, cw(c..) or ccw(c..) an arc to the next point about the centre after c; other vN are vias at no path point)
+3V3: C105.1 C108.2 C109.2 C111.1 C112.2 P100.1 P101.2 P102.2 P103.1 R102.1 R104.1 R106.1 R114.2 R115.2 R116.2 R117.2 U100.9 U101.19 U101.20 | length 90.4
  Top Layer w0.3: v1(102.225,96.25) 102.225,94.538 102.55,94.213 ; v1(102.55,84.225) 102.55,93.777 102.55,94.213 ; R106.1 120.25,79.25 ; P102.2 119.15,72.025 124.125,72.025 124.975,72.875 124.975,74.525 120.25,79.25 ; P103.1@122.734,96.105 P103.1 ; 102.55,94.213 113.023,94.213 113.275,93.961 113.275,93.861 113.625,93.511 U100.9 114.075,93.861 114.344,93.861 114.351,93.868 115.968,93.868 116.475,94.375 R102.1 119.12,95.3 P100.1 P103.1 ; 120.25,79.25 R104.1 120.4,83.725 120.625,83.725 122.35,85.45 P101.2 124.375,88.875 124.375,94.195 P103.1
  Bottom Layer w0.3: R116.2 101.35,96.425 101.5,96.275 102.2,96.275 v1(102.225,96.25) ; R115.2 R114.2 102.538,85.263 v1@102.538,84.237 ; v1(102.55,84.225) 102.576,84.225 102.926,83.875 106.235,83.875 C112.2 ; P102.2 118.85,74.325 118.85,74.675 C109.2 ; P100.1 119.925,96.43 120.5,97.005 C105.1 ; C108.2 121.475,88.775 122.35,87.9 P101.2
+5V: C102.2 C103.2 D100.1 D105.1 J100.9 R103.1 U100.4 | length 21.8
  Top Layer w0.3: D105.1 104.475,100.685 104.9,101.11 106.285,101.11 v1(106.325,101.15) 106.92,100.555 U100.4
  Bottom Layer w0.3: J100.9 99.943,91.205 102.628,93.89 102.663,93.89 103.088,94.315 103.088,94.385 104.035,94.385 106.325,96.675 C103.2 ; v1(106.325,101.15) 106.325,100.125 C102.2 106.325,99.625 C103.2 ; R103.1 108.1,98.15 C103.2
+12V: C104.2 C107.1 C110.2 J102.1 J103.1 R101.2 R108.2 U101.13 U101.14 U101.24 U102.3 U102.4 | length 15
  Top Layer w0.3: v1(114.875,82.625) 115.351,83.101 115.351,83.425 115.475,83.425 R101.2
  Bottom Layer w0.3: R108.2 104.15,79.025 106.875,76.3 111.295,76.3 111.875,76.88 U101.13 ; 113.275,85.25 113.275,83.625 114.198,82.702 114.798,82.702 v1(114.875,82.625)
AIN_1: U100.16 U101.21 | length 9.8
  Top Layer w0.3: v1(108.4,85) 108.429,84.971 113.375,84.971 U100.16
  Bottom Layer w0.3: v1(108.4,85) 110.55,82.85 U101.21
AIN_2: U100.15 U101.22 | length 8.4
  Top Layer w0.3: v1(109.25,85.775) 113.609,85.775 U100.15
  Bottom Layer w0.3: v1(109.25,85.775) 109.277,85.748 109.277,85.271 110.998,83.55 111.825,83.55 U101.22
BAT_VOL: R108.1 R111.2 U100.33 | length 6.1
  Top Layer w0.3: v1(100.15,78.7) 100.15,80.525 100.436,80.811 U100.33
  Bottom Layer w0.3: v1(100.15,78.7) 100.162,78.688 100.859,78.688 100.863,78.691 101.235,78.691 101.535,78.991 102.6,78.991 102.75,79.141 R108.1
BIN_1: U100.17 U101.17 | length 8.3
  Top Layer w0.3: v1(109.8,79.55) 109.877,79.627 109.877,80.427 112.451,83.001 113.375,83.001 U100.17
  Bottom Layer w0.3: v1(109.8,79.55) 110.5,80.25 U101.17
BIN_2: U100.18 U101.16 | length 8
  Top Layer w0.3: v1(109.75,78.5) 112.981,81.731 113.375,81.731 U100.18
  Bottom Layer w0.3: v1(109.75,78.5) 110.85,79.6 U101.16
BOOT: R118.2 U100.29 | length 23.3
  Top Layer w0.3: v1(100.075,84.3) 100.075,85.2 100.511,85.636 101.13,85.636 U100.29
  Bottom Layer w0.3: R118.2 98.475,94.225 97.725,93.475 97.725,80.525 98.25,80 99.625,80 100.073,80.448 100.073,84.298 v1(100.075,84.3)
D_N: J104.A7 J104.B7 R112.1 | length 6.1
  Top Layer w0.2: J104.B7 101.757,107.078 102.197,107.078 103.025,106.25 J104.A7
  Top Layer w0.3: J104.A7 103.152,106.317 103.378,106.317 103.436,106.375 104.751,106.375 106.256,104.87 106.256,104.552 R112.1
D_P: J104.A6 J104.B6 R110.1 | length 6.6
  Top Layer w0.3: J104.A6 103.152,107.033 103.378,107.033 103.436,106.975 104.999,106.975 106.675,105.299 106.993,105.299 R110.1
  Bottom Layer w0.2: J104.B6 101.821,106.336 102.287,106.336 103.051,107.1 J104.A6
DBG_LED: D106.1 U100.20 | length 2
  Top Layer w0.3: U100.20 114.066,79.2 D106.1
ESC_PWM: P100.3 U100.11 | length 6.4
  Top Layer w0.3: U100.11 113.946,90.75 119.325,90.75 119.6,91.025 P100.3
GND: C100.1 C101.1 C102.1 C103.1 C104.1 C105.2 C106.2 C107.2 C108.1 C109.1 C110.1 C111.2 C112.1 D101.2 D102.1 D103.1 D104.1 J100.1 J101.2 J102.2 J104.A1 J104.A12 J104.B1 J104.B12 P100.2 P101.5 P102.5 P103.2 P103.3 R107.2 R109.1 R111.1 R113.2 S100.1 S100.2 S101.1 S101.2 U100.2 U100.37 U101.3 U101.4 U101.9 U101.10 U101.18 U102.2 | length 5.6
  Bottom Layer w0.3: R109.1 100.408,103.767 101.668,103.767 J104.B1 J104.A12 ; J104.B12 J104.A1 ; C102.1 104.875,99.775 105.625,99.025 105.625,98.8
  other v1: 116.475,82.375 104.025,85.5 106.675,87 109.25,88.525 97.9,95.575 104.375,97.2 97.925,99.175 102.925,99.6 100.04,107.58
HALL_1_DATA_A: P101.4 U100.13 | length 6.3
  Top Layer w0.3: U100.13 117.769,88.431 P101.4
HALL_1_DATA_B: P101.3 U100.12 | length 8.5
  Top Layer w0.3: U100.12 113.974,89.95 117.75,89.95 P101.3
HALL_2_DATA_A: P102.4 U100.21 | length 10.7
  Top Layer w0.3: U100.21 118.429,78.271 120.85,75.85 P102.4
HALL_2_DATA_B: P102.3 U100.22 | length 8.3
  Top Layer w0.3: U100.22 117.699,77.001 119.35,75.35 P102.3
I3V3: J100.10 U100.8 | length 16.2
  Top Layer w0.3: v1(103.925,95.475) 110.15,95.475 111.976,97.301 111.976,98.151 U100.8
  Bottom Layer w0.3: J100.10 98.784,92.609 99.587,92.609 102.453,95.475 v1(103.925,95.475)
IO35: J100.6 U100.23 | length 10
  Top Layer w0.3: J100.6 97.725,88.32 97.725,93.175 98.061,93.511 U100.23
IO36: J100.7 U100.25 | length 3.7
  Top Layer w0.3: J100.7 100.606,90.621 101.035,90.621 U100.25
IO37: J100.8 U100.24 | length 3.7
  Top Layer w0.3: J100.8 100.606,91.891 101.035,91.891 U100.24
M1_IN: P101.1 U101.5 U101.6
M1_OUT: P101.6 U101.1 U101.2
M2_IN: P102.1 U101.11 U101.12
M2_OUT: P102.6 U101.7 U101.8
NetC100_2: C100.2 C101.2 D100.2 L100.2 U102.1 | length 6
  Bottom Layer w0.5: D100.2 106.188,95.688 107.018,96.518 108.293,96.518 C100.2 C101.2
NetC106_1: C106.1 J104.1 J104.2 J104.3 J104.4 R113.1 | length 19.9
  Top Layer w0.3: J104.1 R113.1
  Bottom Layer w0.3: J104.4 J104.2 ; J104.4@98.725,102.465 J104.3 J104.1
NetD101_1: D101.1 L100.1 U102.5
NetD102_2: D102.2 R101.1 | length 1.5
  Top Layer w0.3: R101.1 115.65,85 117.125,85 D102.2
NetD103_2: D103.2 R103.2 | length 1.5
  Bottom Layer w0.3: R103.2 109.675,98.275 D103.2
NetD104_2: D104.2 R104.2 | length 1.6
  Top Layer w0.3: D104.2 118.725,85 120.225,85 R104.2
NetD105_2: D105.2 J104.A4 J104.A9 J104.B4 J104.B9 | length 12.9
  Top Layer w0.3: D105.2 101.375,100.685 100.2,101.86 100.2,104.075 100.975,104.85 101.042,104.917 ; J104.A9 J104.B4 101.668,104.617 101.342,104.617 101.042,104.917 ; J104.A4 101.64,108.8 101.465,108.625 101.455,108.625 101.042,108.212 101.042,104.917
NetD106_2: D106.2 R106.2 | length 1.6
  Top Layer w0.3: D106.2 115.625,80.675 117.125,80.675 R106.2
NetD107_2: D107.2 R102.2 | length 1.5
  Top Layer w0.3: D107.2 116.425,96.75 R102.2
NetJ101_1: J101.1 J103.2
NetJ104_A5: J104.A5 R107.1 | length 1.5
  Bottom Layer w0.3: J104.A5 103.18,107.95 103.48,108.25 R107.1
NetJ104_B5: J104.B5 R109.2 | length 1.5
  Bottom Layer w0.3: R109.2 100.408,105.333 101.668,105.333 J104.B5
NetR100_1: R100.1 R116.1 S100.3 S100.4 | length 5.2
  Top Layer w0.3: S100.3 99.87,97.855 99.87,99.17 v1(99.875,99.175) 99.87,99.18 99.87,100.395 S100.4
  Bottom Layer w0.3: R100.1 v1(99.875,99.175) 99.875,98.075 R116.1
NetR117_1: R117.1 R118.1 S101.3 S101.4 | length 5
  Top Layer w0.3: S101.3 v1(99.865,95.575) S101.4
  Bottom Layer w0.3: R118.1@99.87,94.225 99.87,95.57 v1(99.865,95.575) 99.907,95.617 99.907,96.583 R117.1
PWM_A: U100.14 U101.23 | length 7.4
  Top Layer w0.3: v1(110.1,86.475) 110.786,87.161 U100.14
  Bottom Layer w0.3: v1(110.1,86.475) 110.1,85.155 111.055,84.2 111.825,84.2 U101.23
PWM_B: U100.19 U101.15 | length 8.4
  Top Layer w0.3: v1(110.5,77) 110.5,78.1 112.861,80.461 113.375,80.461 U100.19
  Bottom Layer w0.3: v1(110.5,77) 110.5,78.345 111.055,78.9 111.825,78.9 U101.15
RESET: R100.2 U100.3 | length 9.1
  Top Layer w0.3: v1(105.112,96.562) 105.112,96.587 105.65,97.125 U100.3
  Bottom Layer w0.3: R100.2 101.275,99.775 102.125,98.925 102.125,97.42 103.37,96.175 104.725,96.175 v1(105.112,96.562)
RX: J100.3 U100.31 | length 2.8
  Top Layer w0.3: J100.3 101.151,83.585 U100.31
SCL: J100.5 R115.1 U100.27 | length 6.4
  Top Layer w0.3: J100.5 100.606,88.081 101.035,88.081 U100.27
  Bottom Layer w0.3: J100.5 99.55,86.125 100.125,86.7 R115.1
SDA: J100.4 R114.1 U100.28 | length 6.3
  Top Layer w0.3: J100.4 99.575,85.78 100.606,86.811 101.035,86.811 U100.28
  Bottom Layer w0.3: J100.4 99.505,84.855 99.925,85.275 R114.1
STAT: D107.1 U100.1 | length 15.3
  Top Layer w0.3: U100.1 102.925,97.99 102.925,95.45 103.625,94.75 112.825,94.75 113.325,95.25 D107.1
TX: J100.2 U100.32 | length 2.8
  Top Layer w0.3: J100.2 101.151,82.315 U100.32
USB_D_N: R112.2 U100.5 | length 6.4
  Top Layer w0.3: R112.2 107.246,103.562 107.564,103.562 108.525,102.601 108.525,98.51 U100.5
USB_D_P: R110.2 U100.6 | length 6.9
  Top Layer w0.3: R110.2 107.983,104.309 107.983,103.991 109.125,102.849 109.125,98.51 U100.6
pads on no net: J104.A8 J104.B8 U100.7 U100.10 U100.26 U100.30 U100.34 U100.35 U100.36

## Polygon pours and split planes (outlines as drawn)
GND on Bottom Layer "NONET_L01_P-001" (solid, remove dead copper, pour order 28): 96.55,115.913 132.75,115.913 132.75,69.475 96.55,69.475
+12V on Bottom Layer "Main" (solid, remove dead copper, pour order 4): 111.775,92.925 111.775,101.5 110.3,102.975 110.3,106.625 116,106.625 116,94.55 114.1,92.65 114.1,78.075 113.412,77.387 111.101,77.387 111.101,78.562 112.701,78.562 112.701,84.55 111.175,84.55 111.025,84.7 111.025,87 109.825,88.2 109.825,92.925
GND on Bottom Layer "Main" (solid, remove dead copper, pour order 27): 112.6,80.6 110.725,80.6 108.875,78.75 108.875,81.475 110.325,81.475 110.675,81.125 112.6,81.125
GND on Bottom Layer "Main" (solid, remove dead copper, pour order 26): 116.275,72.75 122.95,72.75 122.95,76.75 119.975,79.725 119.975,89.675 116.625,93.025 114.925,93.025 114.3,92.4 114.3,74.725
NetJ101_1 on Bottom Layer "Main" (solid, remove dead copper, pour order 20): 110.3,106.875 110.3,112.6 121.9,112.6 121.9,106.875
NetC100_2 on Bottom Layer "Main" (solid, remove dead copper, pour order 7): 108.65,91.2 108.65,92.475 107.15,92.475 107.15,94.975 105.6,94.975 105.6,94.075 104.725,93.2 102.725,93.2 102.725,91.2
NetD101_1 on Bottom Layer "Main" (solid, remove dead copper, pour order 6): 103.15,87.3 102.7,87.75 102.7,90.175 108.75,90.175 108.75,88.85 108.15,88.25 106.625,88.25 104.625,86.25 103.15,86.25
+3V3 on Bottom Layer "Main" (solid, remove dead copper, pour order 5): 110.6,81.6 110.85,81.35 112.6,81.35 112.6,82.425 110.65,82.425 109.05,84.025 105.925,84.025 105.925,81.6
GND on Bottom Layer "Main" (solid, remove dead copper, pour order 16): 111.55,93.125 111.55,94.625 108.95,94.625 107.25,94.625 107.25,92.6 108.954,92.6 108.954,88.766 108.234,88.046 106.709,88.046 104.978,86.315 104.978,86.032 109.116,86.032 109.725,86.641 109.725,92.5 109.722,92.503 109.722,93.125
M1_OUT on Bottom Layer "Main" (solid, remove dead copper, pour order 3): 119.475,83.9 119.475,85.35 117.9,85.35 117.1,86.15 117.1,87.525 115.6,87.525 115.6,85.65 117.35,83.9
M1_IN on Bottom Layer "Main" (solid, remove dead copper, pour order 2): 124.475,84.65 124.475,87.525 123.25,87.525 123.25,85.225 120.475,82.45 117.925,82.45 117.925,81.275 121.1,81.275
M2_OUT on Bottom Layer "Main" (solid, remove dead copper, pour order 1): 120.05,80.025 123.2,76.875 123.2,72.725 124.5,72.725 124.5,77.55 120.9,81.15 117.925,81.15 117.925,80.025
M2_IN on Bottom Layer "Main" (solid, remove dead copper, pour order 0): 117.925,77.35 115.7,75.125 115.7,72.725 116.975,72.725 116.975,74.425 119.475,76.925 119.475,78.55 117.925,78.55
GND on Top Layer "NONET_L01_P-001" (solid, remove dead copper, pour order 21): 96.55,112.775 127.675,112.775 127.675,69.475 96.55,69.475
NetJ101_1 on Top Layer "Main" (solid, remove dead copper, pour order 29): 110.975,106.9 121.775,106.9 121.775,113.85 110.975,113.85
GND on Top Layer "Main" (solid, remove dead copper, pour order 14): 117.025,106.45 117.025,98.5 121.775,98.5 121.775,106.45
+12V on Top Layer "Main" (solid, remove dead copper, pour order 11): 116.55,106.45 110.975,106.45 110.975,101 113.475,98.5 116.55,98.5
GND on Top Layer "Main" (solid, remove dead copper, pour order 12): 105.575,79.05 109.525,79.05 109.525,85.5 104.675,85.5 104.675,79.95
GND on Top Inner Layer "NONET_L01_P-001" (solid, remove dead copper, pour order 23): 96.55,115.913 132.75,115.913 132.75,69.475 96.55,69.475
no net on Top Inner Layer "Main" (solid, remove dead copper, pour order 13): 118.175,103.075 115.5,103.075 113.633,101.208 113.633,99.417 114.825,98.225 120.5,98.225 120.5,100.75
+12V on Top Inner Layer "Main" (solid, remove dead copper, pour order 19): 125.925,107.525 120.1,107.525 118.075,105.5 118.075,103.625 121.075,100.625 121.075,98.225 124.275,98.225 125.925,99.875
GND on Bottom Inner Layer "NONET_L01_P-001" (solid, remove dead copper, pour order 22): 96.754,115.912 132.954,115.912 132.954,69.475 96.754,69.475
no net on Bottom Inner Layer "Main" (solid, remove dead copper, pour order 9): 114.825,98.225 113.633,99.417 113.633,101.252 115.55,103.125 118.125,103.125 120.5,100.75 120.5,98.225
+12V on Bottom Inner Layer "Main" (solid, remove dead copper, pour order 15): 125.925,107.525 120.1,107.525 118.075,105.5 118.075,103.625 121.075,100.625 121.075,98.225 124.275,98.225 125.925,99.875

## Other copper
Top Layer:
  pour cut-out: 121.7,74.175 122.953,74.175 122.953,72.575 121.7,72.575
  pour cut-out: 99.125,101.694 100.156,101.694 100.7,101.15 100.7,99.84 99.125,99.84
  pour cut-out: 118.25,81.45 119.075,82.275 119.075,82.875 119.75,82.875 120.1,82.525 120.1,80.425 114.3,80.425 114.3,81.45
  pour cut-out: 116.573,87.6 119.177,87.6 119.177,83.925 116.573,83.925
  pour cut-out: 100.65,81.275 97.15,81.275 97.15,81.6 100.65,81.6
  pour cut-out: 116.738,98.422 117.453,98.422 119.012,96.863 119.012,95.84 117.285,95.84 116.738,96.387
  pour cut-out: 109.525,84.58 109.72,84.775 110.175,84.775 110.175,78.15 109.525,78.15
Bottom Layer:
  pour cut-out: 98.9,95.125 99.475,95.125 99.475,94.6 98.9,94.6
  pour cut-out: 101.775,101.325 101.775,101.6 101.353,102.022 99.375,102.022 99.375,101.325
  pour cut-out: 101.9,87.65 102.571,87.65 102.571,90.379 108.625,90.379 108.625,91.05 101.9,91.05

## Silkscreen, mask and mechanical layers (free items; w line width, h text height)
Top Overlay:
  lines w0.15: 114.95,94.45 114.95,93.7 115.225,93.425 ; 116.075,98.575 116.2,98.45 116.425,98.225 122.027,98.225 ; 118.675,81.55 119.4,80.825 119.4,80.75 ; 119.4,80.413 119.487,80.5 120.25,80.5 121.475,80.5 123.588,80.5 ; 121.275,99.85 121.875,99.85 122.075,100.05 ; 121.825,78.725 121.825,82.075 ; 123.475,104.5 123.975,104.5 ; 123.475,109.3 123.975,109.3
  lines w0.2: 119.4,78.75 123.675,78.75 123.675,82.075 119.4,82.075 119.4,78.75
  text "BAT+" at 125.565,107.885 h0.8 r90
  text "SW" at 110.04,106.135 h0.8 r90
  text "BAT-" at 125.565,103.535 h0.8 r90
  text "ESC-" at 122.635,100.185 h0.8
  text "ESC+" at 122.635,98.485 h0.8
  text "R" at 97.675,98.275 h0.3
  text "B" at 97.675,96.425 h0.3
  text "STAT" at 115.62,93.045 h0.5
  text "M1" at 125.44,83.46 h0.8 r90
  text "3V" at 122.245,81.045 h0.6
  text "12V" at 119.82,81.02 h0.6
  text "I3v3" at 97.77,79.27 h0.5
  text "DBG" at 119.835,79.28 h0.6
  text "5V" at 97.77,78.395 h0.5
  text "IO37" at 97.77,77.52 h0.5
  text "IO36" at 97.77,76.645 h0.5
  text "IO35" at 97.77,75.77 h0.5
  text "M2" at 125.465,75.56 h0.8 r90
  text "SCL" at 97.77,74.895 h0.5
  text "SDA" at 97.77,74.02 h0.5
  text "RX" at 97.77,73.145 h0.5
  text "TX" at 97.77,72.27 h0.5
  text "GND" at 97.77,71.395 h0.5
Bottom Overlay:
  lines w0.15: 116.075,98.575 116.2,98.45 116.425,98.225 119.675,98.225 ; 121.275,99.85 121.875,99.85 122.075,100.05 ; 123.475,104.5 123.975,104.5 ; 123.475,109.3 123.975,109.3
  text "BAT+" at 125.565,110.915 h0.8 r90
  text "SW" at 110.04,107.465 h0.8 r90
  text "BAT-" at 125.565,106.565 h0.8 r90
  text "ESC-" at 125.565,100.185 h0.8
  text "ESC+" at 125.565,98.485 h0.8
  text ".GlobalProjectRevision" at 99.09,78.335 h0.8
  text ".GlobalRevisionDate" at 104.79,76.96 h0.8
  text "Robin Madar" at 109.49,75.635 h0.8
  text "Vadim Kokurin" at 109.49,74.335 h0.8
  text "Valdis" at 107.2,71.775 h1.5
Mechanical 1:
  the board outline again, w0.254

## Dimensions
127.025,112.275 to 97.025,112.275 on Mechanical 1
127.025,112.275 to 127.025,70.275 on Mechanical 1